# EAGLE board PCB (EAGLE 9.7.0)
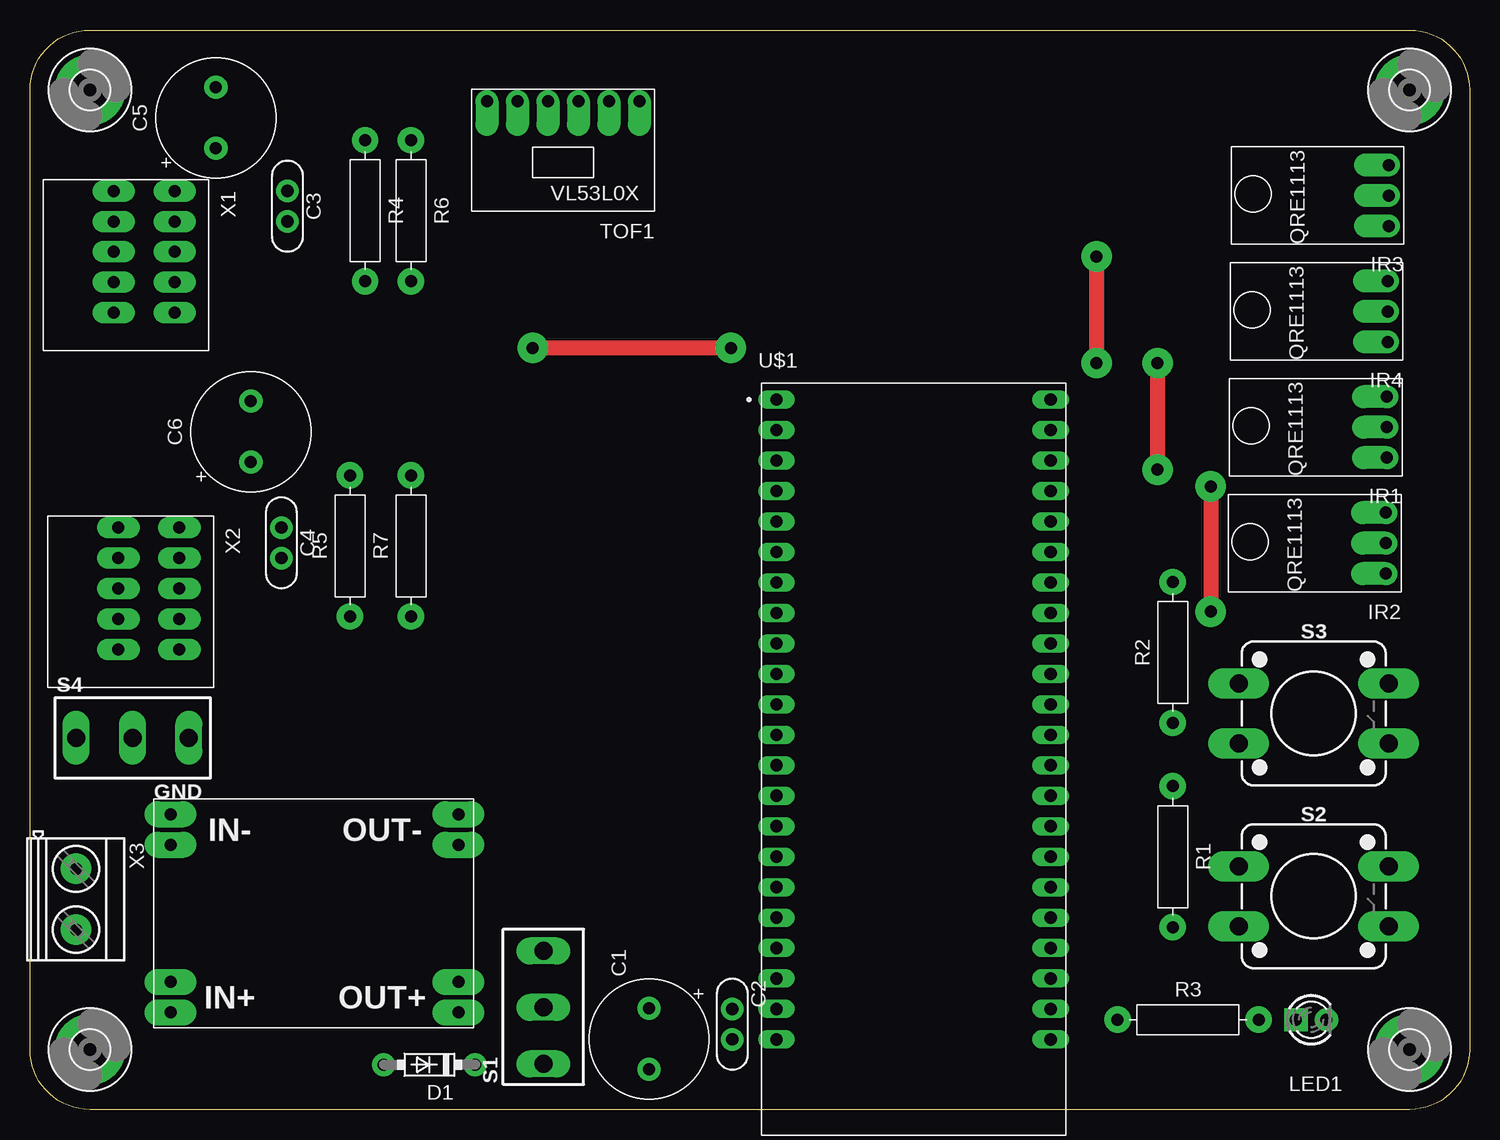
[diagram p0: board, top side]
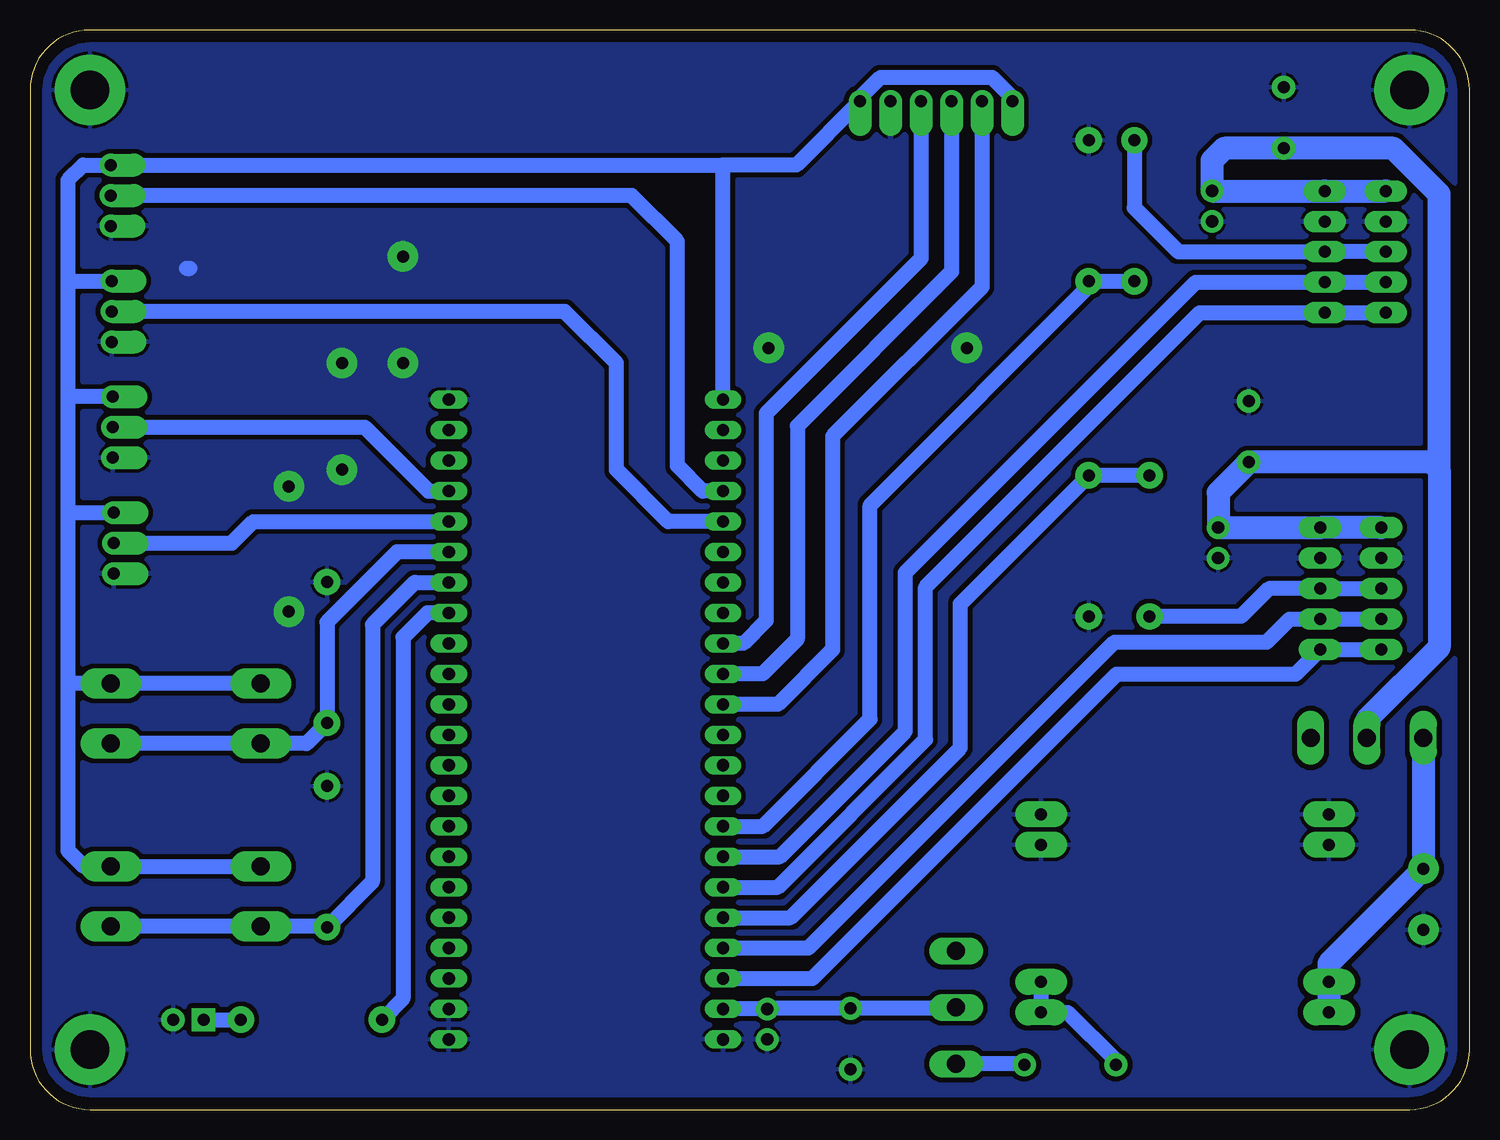
[diagram p1: board, bottom side, seen from below]

Size 120 x 90 mm. Coordinates in mm from the lower left corner, seen from the top.
Outline: 115,0 5,0 arc-90 0,5 0,85 arc-90 5,90 115,90 arc-90 120,85 120,5 arc-90 115,0
Copper layers (1*16): Top / Bottom
Stack-up Default Layer Stack: Top SilkScreen Epoxy Ink / Top SolderMask SR:Green 0.0254mm Dk 4.3 / Top Surface Finish Lead-Free 0.02mm / Top CuFoil:007 0.035mm / Dielectric-1 User Defined 1.5mm / Bottom CuFoil:007 0.035mm / Bottom Surface Finish Lead-Free 0.02mm / Bottom SolderMask SR:Green 0.0254mm Dk 4.3 / Bottom SilkScreen Epoxy Ink
Design rules: minimum drill size 25mil, minimum copper width 30mil, keepout clearance 0mil, drill distance 16mil, via restrict clearance 0mil, dimension clearance 40mil, restrict clearance 0mil, copper clearance wire_polygon to wire_polygon 16mil, copper clearance wire_polygon to pad_smd 16mil, copper clearance wire_polygon to via 16mil, copper clearance pad_smd to pad_smd 16mil, copper clearance pad_smd to via 16mil, copper clearance via to via 16mil, copper clearance smd to pad (same net) 16mil, copper clearance smd to via (same net) 16mil, copper clearance smd to smd (same net) 16mil

## Footprints (pad centres in the part's own frame; a part is rotated, then mirrored left to right if it is on the bottom)
CAPPRD508W65D1000H1100B = drill 1 pad 1.93: 1 -2.54,0; 2 2.54,0
CAP-THRU-2.54MM = drill 1.016 pad 1.88: 1 -1.27,0; 2 1.27,0
DO41-7.6 = drill 1 pad 1.93: A 3.81,0; C -3.81,0
DC_POWER_MODULE = drill 1 pad 2.184 long: IN1+ -24,-13.97; IN1- -24,0; IN2+ -24,-16.51; IN2- -24,-2.54; OUT1+ 0,-13.97; OUT1- 0,0; OUT2+ 0,-16.51; OUT2- 0,-2.54
3,2-PAD = drill 3.2 pad 5.842: B3,2 0,0
QRE1113 = drill 1 pad 1.93 offset: 1 0,2.54; 2 0,0; 3 0,-2.54
LED3MM = drill 1 pad 1.93 square: A -1.27,0 | drill 1 pad 1.93: K 1.27,0
RESAD1176W63L850D250B = drill 1 pad 2.184: 1 -5.88,0; 2 5.88,0
SS12D10 = drill 1.5 pad 2 long: 1 -4.7,0; 2 0,0; 3 4.7,0
TACTILE_SWITCH_PTH_12MM = drill 1.5 pad 2.54 long: 1 6.25,-2.5; 2 -6.25,-2.5; 3 6.25,2.5; 4 -6.25,2.5
VL53L0X = drill 1 pad 1.93 offset: 1 -6.35,-0.267; 2 -3.81,-0.267; 3 -1.27,-0.267; 4 1.27,-0.267; 5 3.81,-0.267; 6 6.35,-0.267
ESP32-S3-DEVKITC-1-N8R8 = drill 1.02 long: J1_1 -11.43,29.97; J1_2 -11.43,27.43; J1_3 -11.43,24.89; J1_4 -11.43,22.35; J1_5 -11.43,19.81; J1_6 -11.43,17.27; J1_7 -11.43,14.73; J1_8 -11.43,12.19; J1_9 -11.43,9.65; J1_10 -11.43,7.11; J1_11 -11.43,4.57; J1_12 -11.43,2.03; J1_13 -11.43,-0.51; J1_14 -11.43,-3.05; J1_15 -11.43,-5.59; J1_16 -11.43,-8.13; J1_17 -11.43,-10.67; J1_18 -11.43,-13.21; J1_19 -11.43,-15.75; J1_20 -11.43,-18.29; J1_21 -11.43,-20.83; J1_22 -11.43,-23.37; J3_1 11.43,29.97; J3_2 11.43,27.43; J3_3 11.43,24.89; J3_4 11.43,22.35; J3_5 11.43,19.81; J3_6 11.43,17.27; J3_7 11.43,14.73; J3_8 11.43,12.19; J3_9 11.43,9.65; J3_10 11.43,7.11; J3_11 11.43,4.57; J3_12 11.43,2.03; J3_13 11.43,-0.51; J3_14 11.43,-3.05; J3_15 11.43,-5.59; J3_16 11.43,-8.13; J3_17 11.43,-10.67; J3_18 11.43,-13.21; J3_19 11.43,-15.75; J3_20 11.43,-18.29; J3_21 11.43,-20.83; J3_22 11.43,-23.37
KF141R-254-5P = drill 1 pad 1.778 long: P$1 0,0; P$2 2.54,0; P$3 5.08,0; P$4 7.62,0; P$5 0,-5.08; P$6 2.54,-5.08; P$7 5.08,-5.08; P$8 7.62,-5.08; P$9 10.16,0; P$10 10.16,-5.08
MKDSN1,5/2-5,08 = drill 1 pad 2.54: 1 -2.561,0.025; 2 2.519,0.025

## Placement (x,y rotation side)
C1  [CAPPRD508W65D1000H1100B]  51.6,5.88 270 top
C2  [CAP-THRU-2.54MM]  58.55,7.11 270 top
C3  [CAP-THRU-2.54MM]  21.46,75.31 270 top
C4  [CAP-THRU-2.54MM]  20.95,47.24 270 top
C5  [CAPPRD508W65D1000H1100B]  15.49,82.68 90 top
C6  [CAPPRD508W65D1000H1100B]  18.41,56.52 90 top
D1  1N5817-B  [DO41-7.6]  33.3,3.73 180 top
GND  DC_POWER_MODULE  [DC_POWER_MODULE]  35.71,24.61 0 top
H1  MOUNT-PAD-ROUND3.2  [3,2-PAD]  115,5 0 top
H2  MOUNT-PAD-ROUND3.2  [3,2-PAD]  5,5 0 top
H3  MOUNT-PAD-ROUND3.2  [3,2-PAD]  115,85 0 top
H4  MOUNT-PAD-ROUND3.2  [3,2-PAD]  5,85 0 top
IR1  QRE1113  [QRE1113]  113.11,56.88 180 top
IR2  QRE1113  [QRE1113]  113.03,47.22 180 top
IR3  QRE1113  [QRE1113]  113.26,76.2 180 top
IR4  QRE1113  [QRE1113]  113.18,66.54 180 top
LED1  LED3MM  [LED3MM]  106.81,7.49 0 top
R1  [RESAD1176W63L850D250B]  95.25,21.08 270 top
R2  [RESAD1176W63L850D250B]  95.25,38.1 90 top
R3  [RESAD1176W63L850D250B]  96.54,7.49 0 top
R4  [RESAD1176W63L850D250B]  27.94,74.93 270 top
R5  [RESAD1176W63L850D250B]  26.67,46.99 90 top
R6  [RESAD1176W63L850D250B]  31.75,74.93 270 top
R7  [RESAD1176W63L850D250B]  31.75,46.99 90 top
S1  SS12D10SS12D10_SS12D10  [SS12D10]  42.8,8.51 90 top
S2  MOMENTARY-SWITCH-SPST-PTH-12MM  [TACTILE_SWITCH_PTH_12MM]  107.01,17.78 0 top
S3  MOMENTARY-SWITCH-SPST-PTH-12MM  [TACTILE_SWITCH_PTH_12MM]  107.01,33.02 0 top
S4  SS12D10SS12D10_SS12D10  [SS12D10]  8.54,30.99 0 top
TOF1  VL53L0XRECTANGLE  [VL53L0X]  44.45,83.78 180 top
U$1  ESP32-S3-DEVKITC-1-N8R8  [ESP32-S3-DEVKITC-1-N8R8]  73.66,29.21 0 top
X1  FK141R-254-5P  [KF141R-254-5P]  12.06,76.58 270 top
X2  FK141R-254-5P  [KF141R-254-5P]  12.45,48.51 270 top
X3  MKDSN1,5/2-5,08  [MKDSN1,5/2-5,08]  3.81,17.5 270 top

## Library data of the parts
C1 C5 C6 = PAEN Components Library; CATEGORY: Capacitor; PACKAGE_SIZE: 11MM-DIA; PACKAGE_TYPE: Through Hole; SUBCATEGORY: Aluminum Electrolytic Capacitors; TYPE: Radial Can
C2-C4 = PAEN Components Library; CATEGORY: Capacitor
D1 GND H1-H4 IR1-IR4 LED1 TOF1 X1-X3 = PAEN Components Library
R1-R7 = PAEN Components Library; CATEGORY: Resistors; DESCRIPTION: Axial Resistor 11.76 mm pitch 8.5 mm body length 2.5 mm body diameter; PACKAGE_SIZE: Axial; PACKAGE_TYPE: Through Hole
S1 S4 = PAEN Components Library; JLCPCB_PN: C2887259
S2 S3 = PAEN Components Library; PROD_ID: SWCH-09185; SF_SKU: COM-09190
U$1 = PAEN Components Library; AVAILABILITY: In Stock; CHECK_PRICES: https://www.snapeda.com/parts/ESP32-S3-DEVKITC-1-N8R8/Espressif+Systems/view-part/?ref=eda; DESCRIPTION: The ESP32-S3-DEVKITC-1-N8R8 from Espressif Systems is a development board designed for RF, RFID, and wireless applications. It supports 802.11 b/g/n Wi-Fi and Bluetooth® 5.x (BLE) connectivity at 2.4GHz, making it ideal for IoT and wireless communication projects. This board is powered by the ESP32-S3-WROOM-1-N8R8 module, which features 8MB Quad SPI Flash and 8MB Octal SPI for efficient memory storage and processing.; MF: Espressif Systems; MP: ESP32-S3-DEVKITC-1-N8R8; PACKAGE: None; PRICE: None; SNAPEDA_LINK: https://www.snapeda.com/parts/ESP32-S3-DEVKITC-1-N8R8/Espressif+Systems/view-part/?ref=snap

## Nets
3V3: IR1.3 IR2.3 IR3.3 IR4.3 S2.3 S2.4 S3.3 S3.4 TOF1.1 TOF1.6 U$1.J1_1
3V3.: U$1.J1_2
12V: C3.1 C4.1 C5.1 C6.1 S4.2 X1.P$1 X1.P$5 X2.P$1 X2.P$5
+5V: C1.1 C2.1 S1.2 U$1.J1_21
DIR1: U$1.J1_17 X1.P$9 X1.P$10
DIR2: U$1.J1_20 X2.P$9 X2.P$10
GND: C1.2 C2.2 C3.2 C4.2 C5.2 C6.2 GND.IN1- GND.IN2- GND.OUT1- GND.OUT2- H1.B3,2 H2.B3,2 H3.B3,2 H4.B3,2 IR1.1 IR2.1 IR3.1 IR4.1 LED1.K R1.1 R2.2 R6.1 R7.1 TOF1.2 U$1.J1_22 U$1.J3_1 U$1.J3_21 U$1.J3_22 X1.P$2 X1.P$6 X2.P$2 X2.P$6 X3.2
GPIO1: IR1.2 U$1.J3_4
GPIO2: IR2.2 U$1.J3_5
GPIO4: IR3.2 U$1.J1_4
GPIO5: IR4.2 U$1.J1_5
GPIO9: R4.2 R6.2 U$1.J1_15
GPIO12: R5.2 R7.2 U$1.J1_18
GPIO18: TOF1.5 U$1.J1_11
N$1: D1.A GND.OUT1+ GND.OUT2+
N$2: D1.C S1.1
N$3: R1.2 S2.1 S2.2 U$1.J3_7
N$4: R2.1 S3.1 S3.2 U$1.J3_6
N$5: R3.1 U$1.J3_8
N$6: LED1.A R3.2
N$7: GND.IN1+ GND.IN2+ S4.1 X3.1
PWM1: U$1.J1_16 X1.P$4 X1.P$8
PWM2: U$1.J1_19 X2.P$4 X2.P$8
S1: R4.1 X1.P$3 X1.P$7
S2: R5.1 X2.P$3 X2.P$7
SCL: TOF1.3 U$1.J1_9
SDA: TOF1.4 U$1.J1_10

## Tracks (layer width: path | path; a pad name or v marks a point on that pad's centre or on a via)
3V3
  Bottom 1.27: 116.84,69.08 116.84,77.47 115.57,78.74 IR3.3 62.23,78.74 | 116.84,69.08 IR4.3 | 116.84,49.78 116.84,35.52 | 116.84,35.52 116.84,21.59 115.53,20.28 S2.3 S2.4 | IR1.3 116.84,59.42 | TOF1.6 38.1,84.35 39.81,86.06 49.09,86.06 50.8,84.35 TOF1.1 56.11,78.74 62.23,78.74 | 116.84,69.08 116.84,59.42 | 116.84,59.42 116.84,49.78 | 116.84,49.78 113.06,49.78 IR2.3 | U$1.J1_1 62.23,78.74 | S3.4 S3.3 116.84,35.52
12V
  Bottom 1.905: 2.54,53.34 2.54,76.33 6.35,80.14 C5.1 20.45,80.14 21.46,79.12 C3.1 X1.P$1 X1.P$5 | 2.54,53.34 2.54,38.51 8.54,32.5 S4.2 | 2.54,53.34 3.17,53.98 C6.1 20.95,51.44 C4.1 X2.P$1 X2.P$5
+5V
  Bottom 1.27: U$1.J1_21 C2.1 58.51,8.42 C1.1 42.88,8.42 S1.2
DIR1
  Bottom 1.27: X1.P$10 X1.P$9 22.49,66.42 45.35,43.55 45.35,30.85 57.66,18.54 U$1.J1_17
DIR2
  Bottom 1.27: X2.P$10 X2.P$9 14.5,36.3 29.4,36.3 54.78,10.92 U$1.J1_20
GND  (via drill 1 pad 2.54)
  Top 1.27: v88.9,71.12 v88.9,62.23 | v93.98,62.23 v93.98,53.34 | v98.42,51.94 v98.42,41.5 | v58.42,63.5 v41.91,63.5
  Bottom 1.27: 106.95,70.12 106.68,70.12
  pour Bottom (isolate 0.406): -2.54,91.44 -2.54,0 arc90 -1.27,-1.27 115.65,-1.27 arc90 120.65,3.73 120.65,91.44
GPIO1
  Bottom 1.27: U$1.J3_4 86.78,51.56 92.1,56.88 IR1.2
GPIO2
  Bottom 1.27: IR2.2 103.18,47.22 101.38,49.02 U$1.J3_5
GPIO4
  Bottom 1.27: U$1.J1_4 63.92,51.56 66.04,53.68 66.04,72.39 69.85,76.2 IR3.2
GPIO5
  Bottom 1.27: U$1.J1_5 66.8,49.02 71.12,53.34 71.12,62.23 75.43,66.54 IR4.2
GPIO9
  Bottom 1.27: U$1.J1_15 58.91,23.62 49.98,32.55 49.98,50.37 31.3,69.05 | R6.2 31.3,69.05 | 31.3,69.05 R4.2
GPIO12
  Bottom 1.27: R5.2 R7.2 42.46,42.16 42.46,30.15 56.61,16 U$1.J1_18
GPIO18
  Bottom 1.27: TOF1.5 40.64,68.58 53.09,56.13 53.09,38.35 57.66,33.78 U$1.J1_11
N$1
  Bottom 1.27: GND.OUT1+ GND.OUT2+ 33.5,8.1 29.49,4.09 D1.A
N$2
  Bottom 1.27: D1.C 37.19,3.81 S1.1
N$3
  Bottom 1.27: S2.1 S2.2 95.33,15.28 R1.2 91.44,19.01 91.44,40.42 87.92,43.94 U$1.J3_7
N$4
  Bottom 1.27: S3.1 S3.2 96.95,30.52 R2.1 95.25,40.64 89.41,46.48 U$1.J3_6
N$5
  Bottom 1.27: U$1.J3_8 86.87,41.4 88.9,39.37 88.9,9.25 R3.1
N$6
  Bottom 1.27: LED1.A R3.2
N$7
  Bottom 1.905: S4.1 3.84,20.07 X3.1 11.71,12.19 GND.IN1+ GND.IN2+
PWM1
  Bottom 1.27: X1.P$8 X1.P$4 22.83,68.96 47.03,44.76 47.03,31.54 57.49,21.08 U$1.J1_16
PWM2
  Bottom 1.27: X2.P$8 X2.P$4 14.99,40.89 16.9,38.98 29.6,38.98 55.12,13.46 U$1.J1_19
S1
  Bottom 1.27: X1.P$7 X1.P$3 24.27,71.5 27.94,75.18 R4.1
S2
  Bottom 1.27: X2.P$7 X2.P$3 16.73,43.43 19.05,41.11 R5.1
SCL
  Bottom 1.27: U$1.J1_9 60.54,38.86 58.64,40.76 58.64,58.03 45.72,70.95 TOF1.3
SDA
  Bottom 1.27: TOF1.4 43.18,69.85 56.03,57 56.03,39.22 58.93,36.32 U$1.J1_10